# EAGLE board KEX V1 (EAGLE 7.5.0)
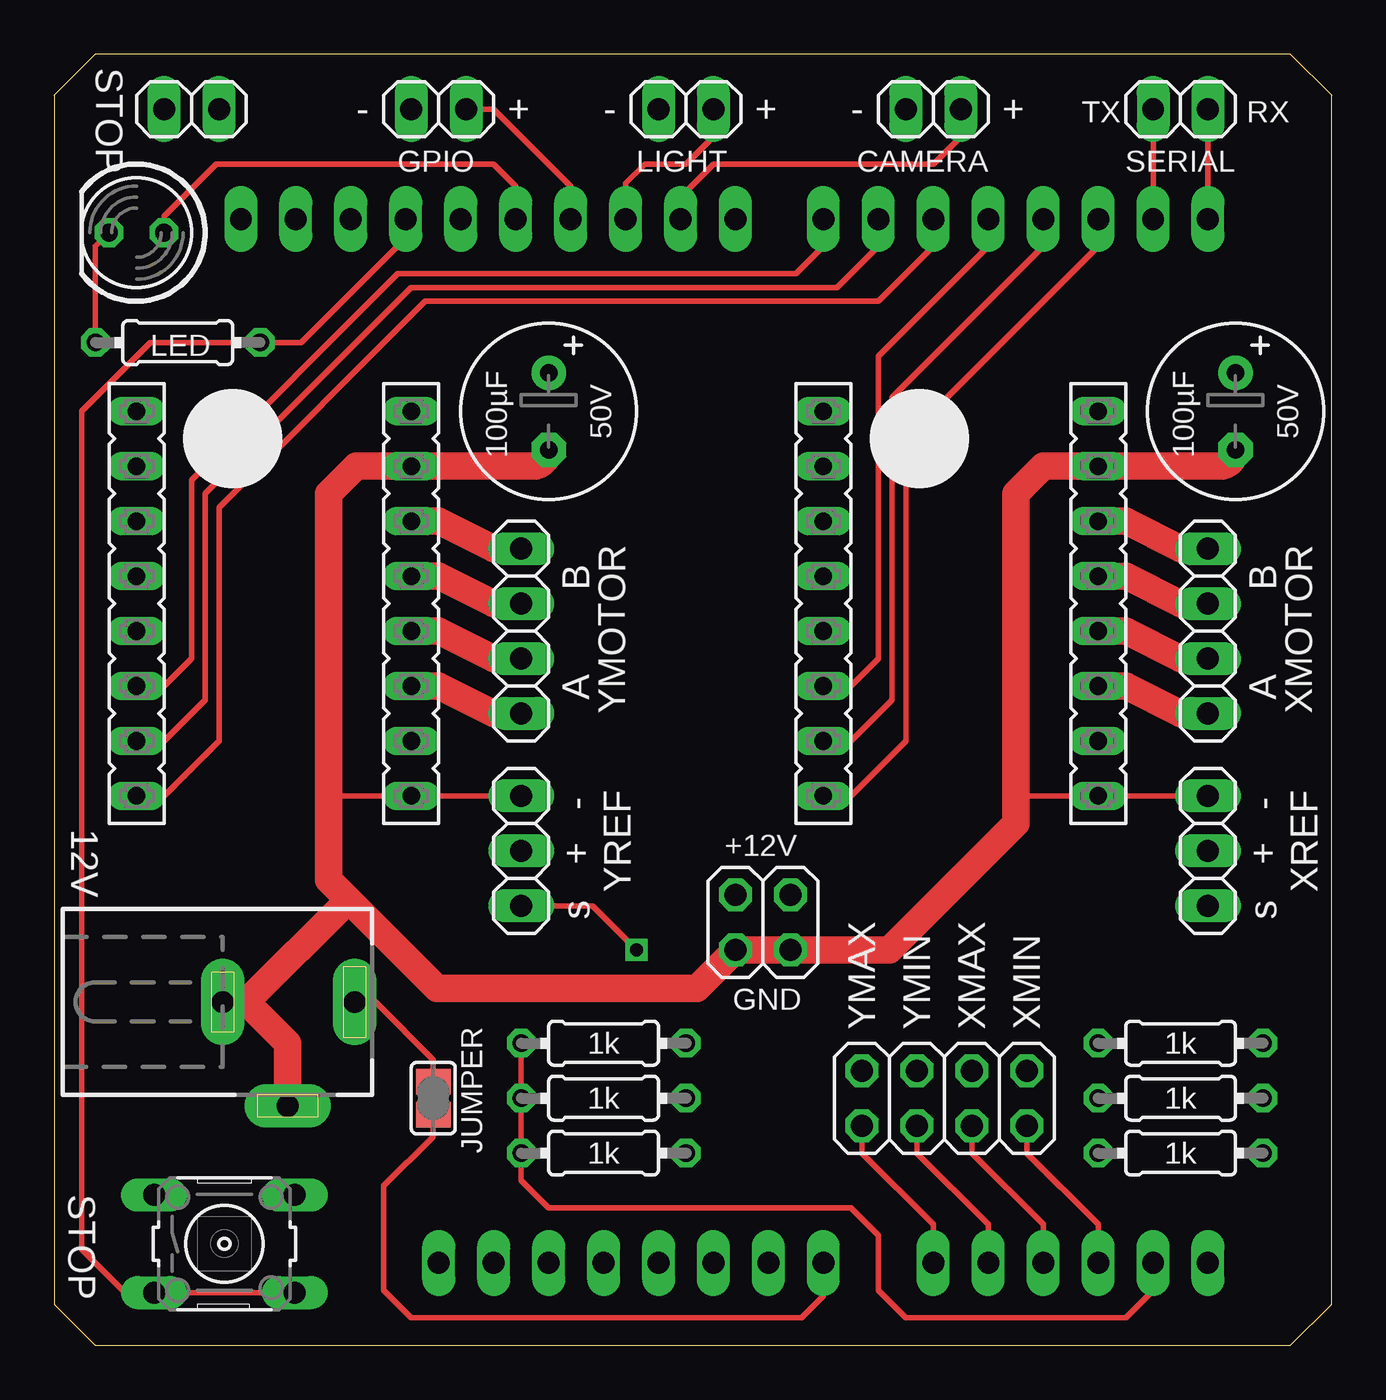
[diagram p0: board, top side]
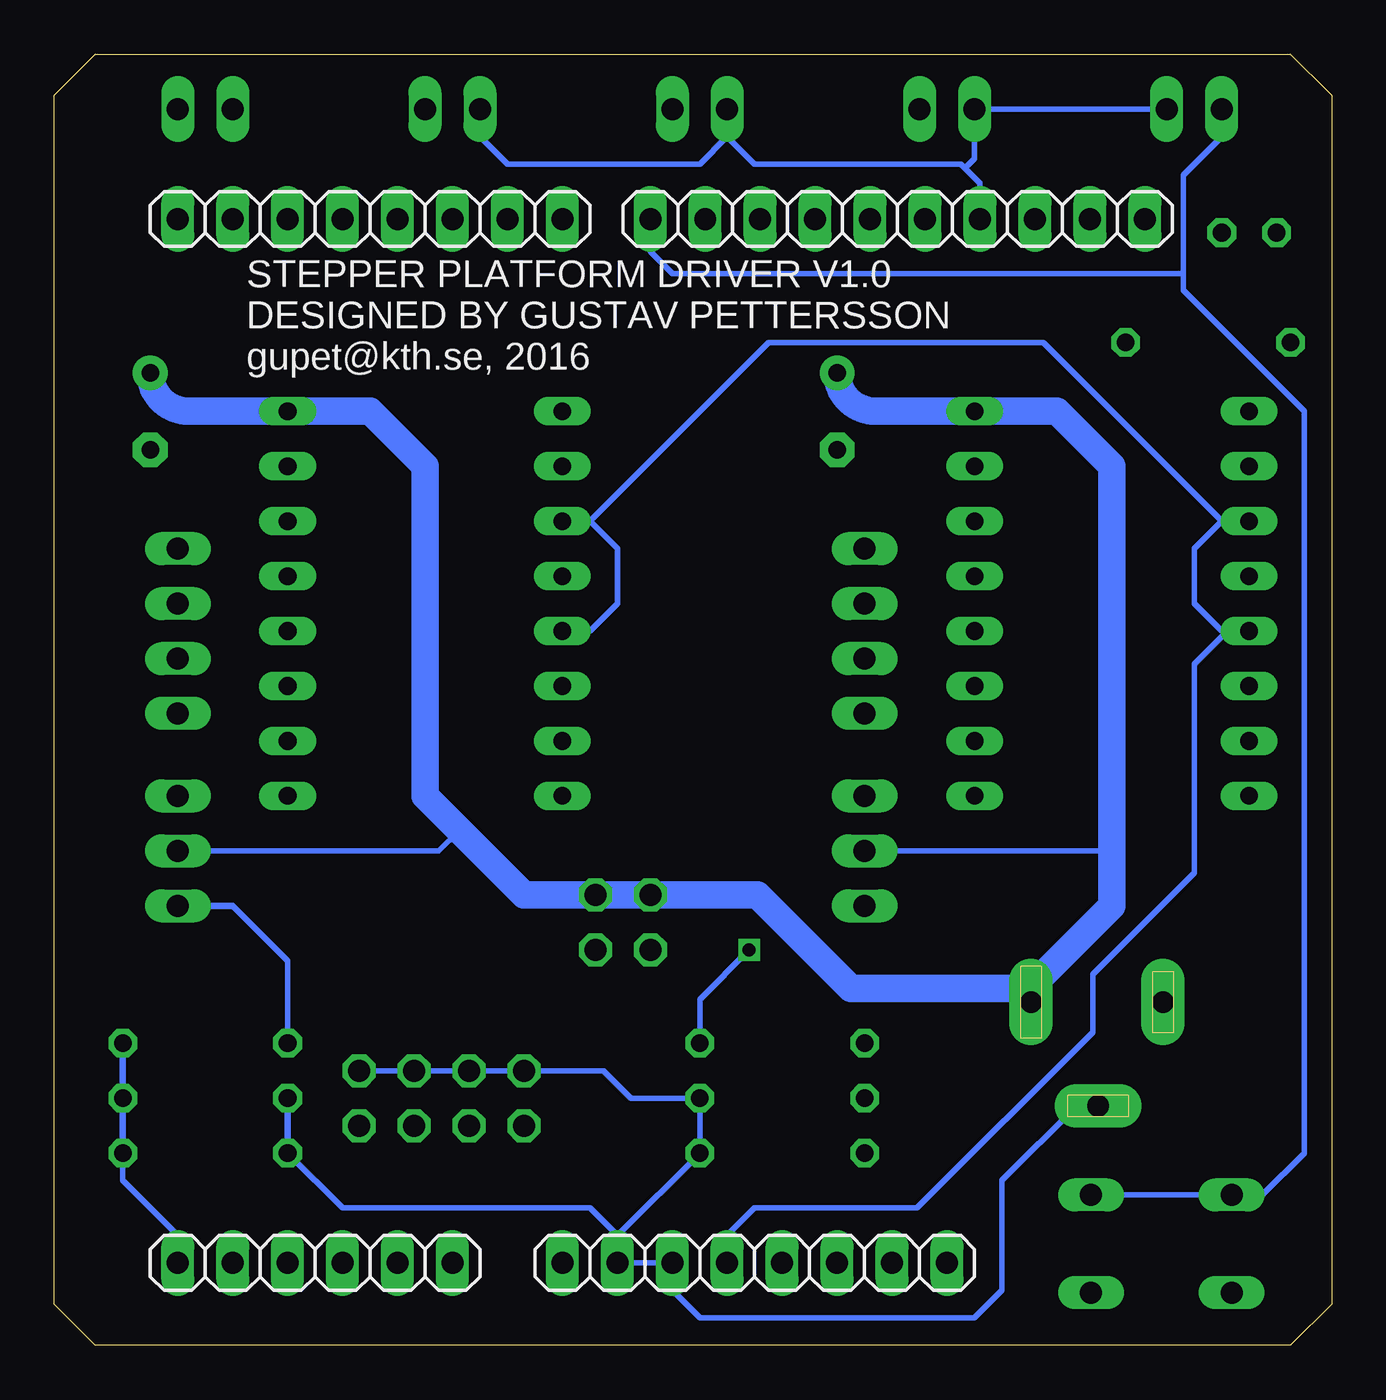
[diagram p1: board, bottom side, seen from below]

Size 59.05 x 59.69 mm. Coordinates in mm from the lower left corner, seen from the top.
Outline: 1.91,0 57.15,0 59.05,1.9 59.05,57.78 57.15,59.69 1.91,59.69 0,57.78 0,1.9 1.91,0
Copper layers (1*16): Top 0.035mm / dielectric 1.5mm / Bottom 0.035mm
Design rules "default *": minimum track width 10mil, minimum drill 24mil, track to track 8mil, track to pad 8mil, pad to pad 8mil, via to via 8mil, smd to smd 8mil, copper to edge 40mil, drill to drill 8mil, minimum pad ring 10mil, minimum via ring 8mil, stop-mask expansion 2mil, vias tented up to drill 0mil, thermal gap 10mil

## Footprints (pad centres in the part's own frame; a part is rotated, then mirrored left to right if it is on the bottom)
1X06 = drill 1.016 long: 1 -6.35,0; 2 -3.81,0; 3 -1.27,0; 4 1.27,0; 5 3.81,0; 6 6.35,0
E3,5-8 = drill 0.813 pad 1.6: + -1.778,0 | drill 0.813 pad 1.6 octagon: - 1.778,0
1X02 = drill 1.016 long: 1 -1.27,0; 2 1.27,0
1X10 = drill 1.016 long: 1 -11.43,0; 2 -8.89,0; 3 -6.35,0; 4 -3.81,0; 5 -1.27,0; 6 1.27,0; 7 3.81,0; 8 6.35,0; 9 8.89,0; 10 11.43,0
1X08 = drill 1.016 long: 1 -8.89,0; 2 -6.35,0; 3 -3.81,0; 4 -1.27,0; 5 1.27,0; 6 3.81,0; 7 6.35,0; 8 8.89,0
DCJ0303 = drill 1 pad 2 long: 1 0,3.1; 2 4.8,0; 3 0,-3
2X04 = drill 1.016 octagon: 1 -3.81,-1.27; 2 -3.81,1.27; 3 -1.27,-1.27; 4 -1.27,1.27; 5 1.27,-1.27; 6 1.27,1.27; 7 3.81,-1.27; 8 3.81,1.27
2X02 = drill 1.016 octagon: 1 -1.27,-1.27; 2 -1.27,1.27; 3 1.27,-1.27; 4 1.27,1.27
LED5MM = drill 0.813 octagon: A -1.27,0; K 1.27,0
0204/7 = drill 0.813 octagon: 1 -3.81,0; 2 3.81,0
B3F-10XX = drill 1.016 long: 1 -3.251,2.261; 2 3.251,2.261; 3 -3.251,-2.261; 4 3.251,-2.261
SJ = smd 1.168 x 1.6: 1 -0.762,0; 2 0.762,0
FE08 = drill 0.813 long: 1 -8.89,0; 2 -6.35,0; 3 -3.81,0; 4 -1.27,0; 5 1.27,0; 6 3.81,0; 7 6.35,0; 8 8.89,0
1X04 = drill 1.016 long: 1 -3.81,0; 2 -1.27,0; 3 1.27,0; 4 3.81,0
1X03 = drill 1.016 long: 1 -2.54,0; 2 0,0; 3 2.54,0

## Placement (x,y rotation side)
ANALOG  [1X06]  46.99,3.81 0 bottom
C3  100µF 50V  [E3,5-8]  22.86,43.18 270 top
C4  100µF 50V  [E3,5-8]  54.61,43.18 270 top
CAMERA  [1X02]  40.64,57.15 180 top
DHIGH  [1X10]  20.07,52.07 0 bottom
DLOW  [1X08]  44.45,52.07 0 bottom
GPIO  [1X02]  17.78,57.15 180 top
J1  12V  [DCJ0303]  10.8,15.88 270 top
JP1  [2X04]  41.15,11.43 0 top
JP2  [1X02]  6.35,57.15 0 top
JP3  [2X02]  32.77,19.56 0 top
JP5  [1X02]  52.07,57.15 180 top
LED1  [LED5MM]  3.81,51.43 180 top
LIGHT  [1X02]  29.21,57.15 180 top
POWER  [1X08]  26.67,3.81 0 bottom
R1  150  [0204/7]  5.71,46.35 180 top
S1  [B3F-10XX]  7.87,4.7 0 top
SJ1  [SJ]  17.53,11.43 270 top
XGND  1k  [0204/7]  52.07,11.43 0 top
XGND2  1k  [0204/7]  52.07,8.89 0 top
XLEFT  [FE08]  35.56,34.29 270 top
XMOTOR  [1X04]  53.34,33.02 270 top
XREF  [1X03]  53.34,22.86 90 top
XRIGHT  [FE08]  48.26,34.29 270 top
XSENSE  1k  [0204/7]  52.07,13.97 0 top
YGND  1k  [0204/7]  25.4,11.43 180 top
YGND2  1k  [0204/7]  25.4,8.89 180 top
YLEFT  [FE08]  3.81,34.29 270 top
YMOTOR  [1X04]  21.59,33.02 270 top
YREF  [1X03]  21.59,22.86 90 top
YRIGHT  [FE08]  16.51,34.29 270 top
YSENSE  1k  [0204/7]  25.4,13.97 180 top

## Library data of the parts
ANALOG CAMERA DHIGH DLOW GPIO JP1-JP3 JP5 LIGHT POWER XMOTOR XREF YMOTOR YREF = pinhead
C3 C4 R1 XGND XGND2 XSENSE YGND YGND2 YSENSE = resistor
J1 = con-jack; OC_FARNELL: unknown; OC_NEWARK: unknown
LED1 = led
S1 = switch-omron; MPN: B3F-1000; OC_FARNELL: 176432; OC_NEWARK: 36M3542
SJ1 = jumper
XLEFT XRIGHT YLEFT YRIGHT = con-lsta; OC_FARNELL: unknown; OC_NEWARK: unknown

## Nets
+5V: POWER.4 XLEFT.3 XLEFT.5 YLEFT.3 YLEFT.5
+12V: C3.+ C4.+ J1.1 JP3.2 JP3.4 SJ1.1 XREF.2 XRIGHT.1 YREF.2 YRIGHT.1
BUTTON: DHIGH.1 JP2.1 S1.1 S1.2
CAMPIN: CAMERA.1 DHIGH.2
DGND: CAMERA.2 DHIGH.7 GPIO.2 JP2.2 LIGHT.2 R1.1 S1.3 S1.4
GND: C3.- C4.- J1.2 J1.3 JP1.2 JP1.4 JP1.6 JP1.8 JP3.1 JP3.3 POWER.2 POWER.3 XGND2.1 XGND.1 XREF.3 XRIGHT.2 XRIGHT.8 YGND2.1 YGND.1 YREF.3 YRIGHT.2 YRIGHT.8
GPIO: DHIGH.4 GPIO.1
LED: DHIGH.5 LED1.A
LIGHTPIN: DHIGH.3 LIGHT.1
N$1: XMOTOR.1 XRIGHT.3
N$2: XMOTOR.2 XRIGHT.4
N$3: XMOTOR.3 XRIGHT.5
N$4: XMOTOR.4 XRIGHT.6
N$5: DLOW.1 JP5.1
N$6: DLOW.2 JP5.2
N$7: YMOTOR.1 YRIGHT.3
N$8: YMOTOR.2 YRIGHT.4
N$9: YMOTOR.3 YRIGHT.5
N$10: YMOTOR.4 YRIGHT.6
N$11: LED1.K R1.2
N$12: POWER.1 SJ1.2
N$16: XREF.1 XSENSE.1
N$17: YREF.1 YSENSE.1
XDIR: DLOW.3 XLEFT.8
XMAX: ANALOG.4 JP1.5
XMIN: ANALOG.3 JP1.7
XREF: ANALOG.1 XGND2.2 XGND.2 XSENSE.2
XSLEEP: DLOW.5 XLEFT.6
XSTEP: DLOW.4 XLEFT.7
YDIR: DLOW.6 YLEFT.8
YMAX: ANALOG.6 JP1.1
YMIN: ANALOG.5 JP1.3
YREF: ANALOG.2 YGND2.2 YGND.2 YSENSE.2
YSLEEP: DLOW.8 YLEFT.6
YSTEP: DLOW.7 YLEFT.7

## Tracks (layer width: path | path; a pad name or v marks a point on that pad's centre or on a via)
+5V
  Bottom 0.254: XLEFT.5 34.29,33.02 33.02,34.29 33.02,36.83 34.29,38.1 | 34.29,38.1 XLEFT.3 | 5.08,38.1 13.34,46.35 26.04,46.35 34.29,38.1 | YLEFT.3 5.08,38.1 | 5.08,38.1 6.35,36.83 6.35,34.29 5.08,33.02 4.83,33.02 | 4.83,33.02 YLEFT.5 | 4.83,33.02 6.35,31.5 6.35,21.84 11.05,17.14 11.05,14.48 19.18,6.35 26.67,6.35 27.94,5.08 POWER.4
+12V
  Top 0.254: SJ1.1 17.53,13.21 14.86,15.88 J1.1
  Bottom 0.254: XREF.2 41.27,22.86 40.32,23.81 | YREF.2 10.16,22.86
  Bottom 1.27: 13.97,16.51 10.16,20.32 10.16,22.86 10.16,40.64 12.7,43.18 YRIGHT.1 21.08,43.18 arc90 C3.+ | 13.97,16.51 22.23,16.51 26.54,20.83 JP3.2 JP3.4 37.34,20.83 40.32,23.81 41.91,25.4 41.91,40.64 44.45,43.18 XRIGHT.1 52.83,43.18 arc90 C4.+ | 13.97,16.51 13.97,15.95 J1.1
BUTTON
  Bottom 0.254: DHIGH.1 31.5,50.55 30.48,49.53 6.86,49.53 | S1.2 S1.1 3.2,6.96 1.27,8.89 1.27,43.18 6.86,48.77 6.86,49.53 | JP2.1 5.08,55.88 6.86,54.1 6.86,49.53
CAMPIN
  Top 0.254: CAMERA.1 41.91,55.88 40.64,54.61 30.48,54.61 28.96,53.09 DHIGH.2
DGND
  Top 0.254: DHIGH.7 16.26,51.18 11.43,46.35 R1.1 4.45,46.35 1.27,43.18 1.27,4.45 3.28,2.44 4.55,2.44 | S1.4 S1.3 | S1.3 4.55,2.44 | S1.3 4.55,2.39 4.55,2.44
  Bottom 0.254: 27.94,55.88 26.67,54.61 17.15,54.61 16.95,54.42 | 16.95,54.42 16.26,53.72 DHIGH.7 | CAMERA.2 39.37,55.88 38.1,54.61 29.21,54.61 27.94,55.88 | 27.94,55.88 LIGHT.2 | 16.95,54.42 16.51,54.86 GPIO.2 JP2.2
GND
  Top 0.254: XREF.3 XRIGHT.8 44.45,25.4 | 12.7,25.4 YRIGHT.8 YREF.3
  Top 1.27: J1.3 8.89,15.88 | J1.2 10.8,13.97 8.89,15.88 | 8.89,15.88 13.62,20.6 | 13.62,20.6 12.7,21.52 12.7,25.4 12.7,39.37 13.97,40.64 YRIGHT.2 22.1,40.64 arc90 C3.- | 13.62,20.6 17.7,16.51 29.72,16.51 JP3.1 JP3.3 38.61,18.29 44.45,24.13 44.45,25.4 44.45,39.37 45.72,40.64 XRIGHT.2 53.85,40.64 arc90 C4.-
  Bottom 0.254: JP1.8 JP1.6 JP1.4 JP1.2 33.66,12.7 32.38,11.43 YGND.1 YGND2.1 33.02,5.08 | XGND2.1 45.72,6.35 34.29,6.35 33.02,5.08 | 33.02,5.08 POWER.2 POWER.3 30.48,2.54 29.21,1.27 16.51,1.27 15.24,2.54 15.24,7.62 11.79,11.08 J1.2
  Bottom 0.305: XGND.1 XGND2.1
GPIO
  Top 0.254: GPIO.1 20.32,57.15 23.88,53.59 DHIGH.4
LED
  Top 0.254: DHIGH.5 21.34,53.59 20.32,54.61 7.49,54.61 5.08,52.2 LED1.A
LIGHTPIN
  Top 0.254: LIGHT.1 30.48,55.88 29.21,54.61 27.3,54.61 26.42,53.72 DHIGH.3
N$1
  Top 1.27: XRIGHT.3 49.53,38.1 52.07,36.83 XMOTOR.1
N$2
  Top 0.254: XRIGHT.4 48.21,35.76 48.29,35.53
  Top 1.27: 48.29,35.53 49.53,35.56 52.07,34.29 XMOTOR.2
N$3
  Top 1.27: XRIGHT.5 49.53,33.02 52.07,31.75 XMOTOR.3
N$4
  Top 1.27: XRIGHT.6 49.53,30.48 52.07,29.21 XMOTOR.4
N$5
  Top 0.254: DLOW.1 JP5.1
N$6
  Top 0.254: JP5.2 DLOW.2
N$7
  Top 1.27: YRIGHT.3 17.78,38.1 20.32,36.83 YMOTOR.1
N$8
  Top 1.27: YRIGHT.4 17.78,35.56 20.32,34.29 YMOTOR.2
N$9
  Top 1.27: YRIGHT.5 17.78,33.02 20.32,31.75 YMOTOR.3
N$10
  Top 1.27: YRIGHT.6 17.78,30.48 20.32,29.21 YMOTOR.4
N$11
  Top 0.254: R1.2 1.91,50.8 LED1.K
N$12
  Top 0.254: POWER.1 35.56,2.29 34.54,1.27 16.51,1.27 15.24,2.54 15.24,7.37 17.53,9.65 SJ1.2
N$16
  Bottom 0.254: 50.8,20.32 48.26,17.78 XSENSE.1
  Bottom 0.305: 50.8,20.32 XREF.1
N$17  (via drill 0.6)
  Top 0.254: v26.92,18.29 24.89,20.32 YREF.1
  Bottom 0.254: YSENSE.1 29.21,16 v26.92,18.29
XDIR
  Top 0.254: DLOW.3 48.26,50.8 39.37,41.91 39.37,27.94 36.83,25.4 XLEFT.8
XMAX
  Top 0.254: ANALOG.4 45.72,5.59 42.42,8.89 JP1.5
XMIN
  Top 0.254: ANALOG.3 48.26,5.59 44.96,8.89 JP1.7
XREF
  Bottom 0.254: ANALOG.1 53.34,5.08 55.88,7.62 XGND2.2
  Bottom 0.305: XGND2.2 XGND.2 XSENSE.2
XSLEEP
  Top 0.254: XLEFT.6 36.83,30.48 38.1,31.75 38.1,45.72 43.18,50.8 DLOW.5
XSTEP
  Top 0.254: XLEFT.7 36.83,27.94 38.74,29.84 38.74,43.81 45.72,50.8 DLOW.4
YDIR
  Top 0.254: YLEFT.8 5.08,25.4 7.62,27.94 7.62,38.73 17.15,48.26 38.1,48.26 40.64,50.8 DLOW.6
YMAX
  Top 0.254: ANALOG.6 40.64,5.59 37.34,8.89 JP1.1
YMIN
  Top 0.254: ANALOG.5 43.18,5.59 39.88,8.89 JP1.3
YREF
  Top 0.254: ANALOG.2 50.8,2.54 49.53,1.27 39.37,1.27 38.1,2.54 38.1,5.08 36.83,6.35 22.86,6.35 21.59,7.62 YGND2.2 YGND.2 YSENSE.2
YSLEEP
  Top 0.254: DLOW.8 35.56,50.8 34.29,49.53 15.88,49.53 6.35,40 6.35,31.75 5.08,30.48 YLEFT.6
YSTEP
  Top 0.254: DLOW.7 38.1,50.8 36.2,48.89 16.51,48.89 6.98,39.37 6.98,29.84 5.08,27.94 YLEFT.7

## Text on the board
tPlace: LED
tNames: STOP | - | + | - | + | - | + | TX | RX | GPIO | LIGHT | CAMERA | SERIAL | 50V | 50V | 100µF | 100µF | B | B | A | A | YMOTOR | XMOTOR | - | - | 12V | +12V | + | + | YREF | XREF | s | s | GND | YMAX | YMIN | XMAX | XMIN | 1k | 1k | 1k | 1k | JUMPER | 1k | 1k | STOP
bNames: STEPPER PLATFORM DRIVER V1.0 | DESIGNED BY GUSTAV PETTERSSON | gupet@kth.se, 2016